# EAGLE board top_PCB_mini (EAGLE 8.1.1)
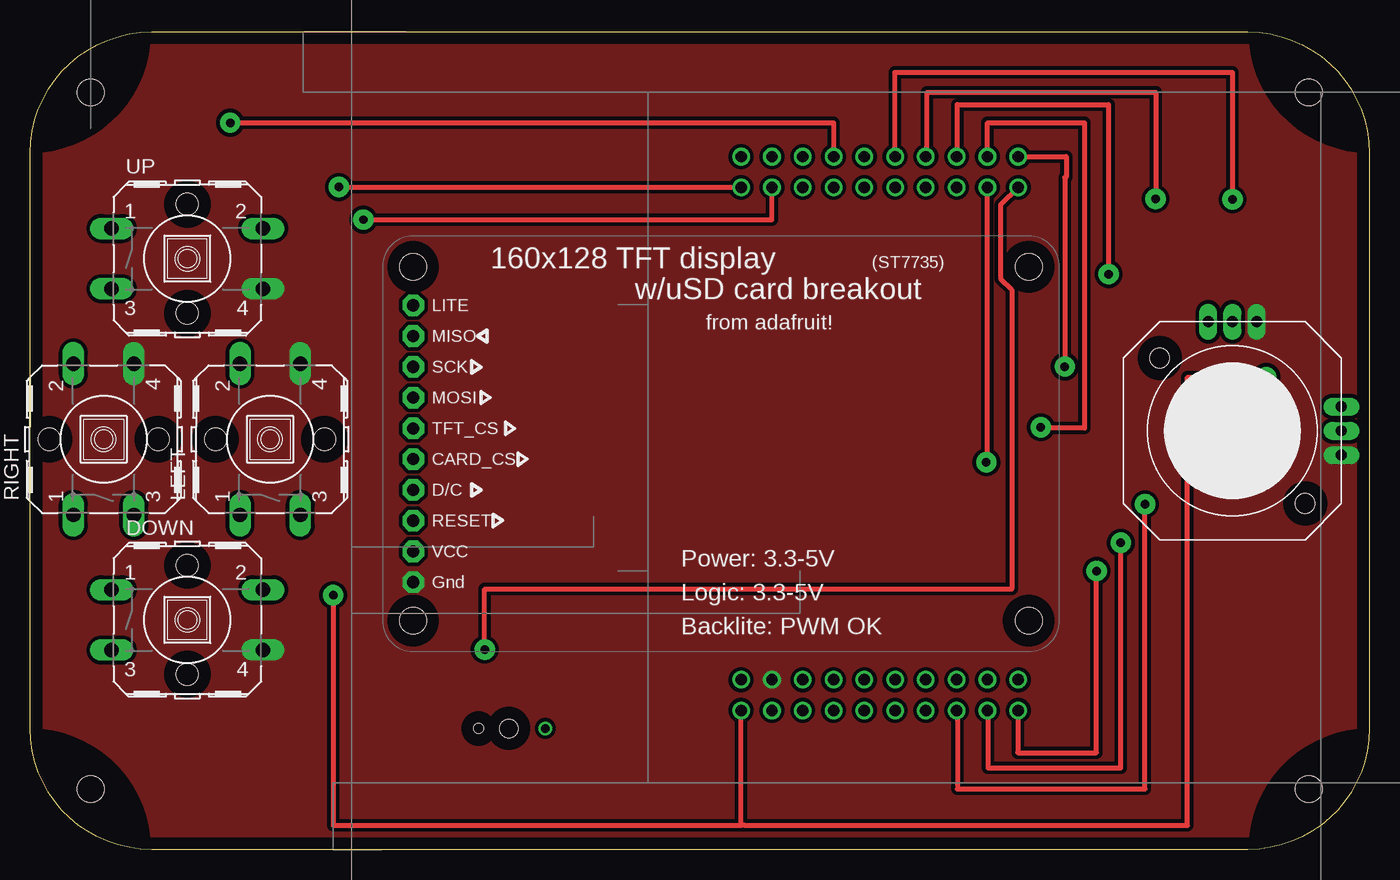
[diagram p0: board, top side]
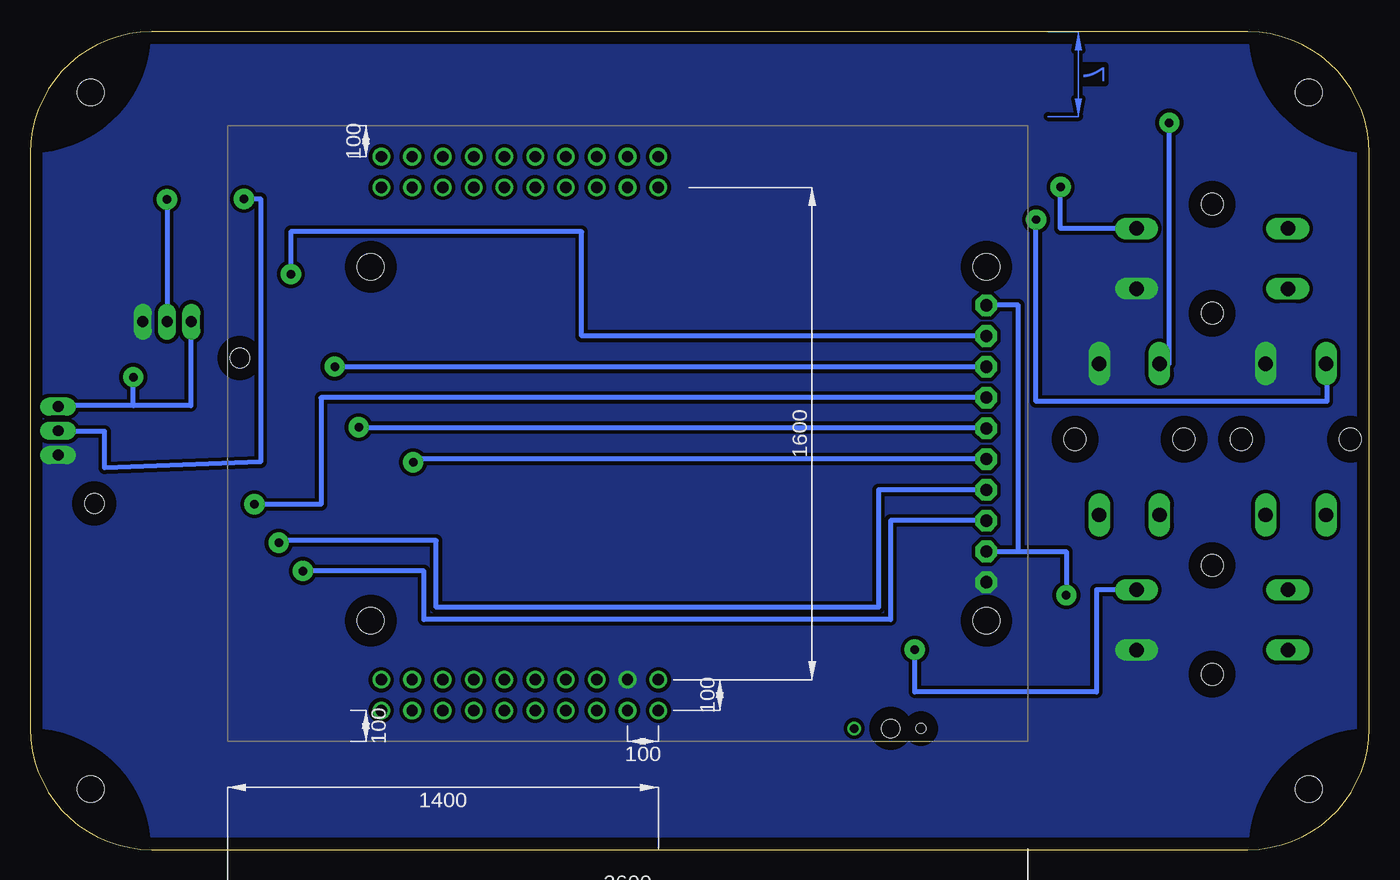
[diagram p1: board, bottom side, seen from below]

Size 110.5 x 67.5 mm. Coordinates in mm from the lower left corner, seen from the top.
Outline: 0,57.5 arc-90 10,67.5 100.5,67.5 arc-90 110.5,57.5 110.5,10 arc-90 100.5,0 10,0 arc-90 0,10 0,57.5
Copper layers (1*16): Top 0.035mm / dielectric 1.5mm / Bottom 0.035mm
Design rules "default": minimum track width 10mil, minimum drill 24mil, track to track 8mil, track to pad 8mil, pad to pad 8mil, via to via 8mil, smd to smd 8mil, copper to edge 40mil, drill to drill 8mil, minimum pad ring 10mil, minimum via ring 8mil, stop-mask expansion 4mil, vias tented up to drill 0mil, thermal gap 10mil
Holes 2.2 mm at 5,5 5,62.5 105.5,62.5 105.5,5
Holes 1.5 mm at 39.5,10
Holes 0.8 mm at 37,10

## Footprints (pad centres in the part's own frame; a part is rotated, then mirrored left to right if it is on the bottom)
ADAFRUITST7735R_18 = drill 1 pad 1.778 octagon: CARD_CS -25.4,-1.27; D/C -25.4,-3.81; GND -25.4,-11.43; LITE -25.4,11.43; MISO -25.4,8.89; MOSI -25.4,3.81; RESET -25.4,-6.35; SCK -25.4,6.35; TFT_CS -25.4,1.27; VCC -25.4,-8.89 | hole 2.2: -25.4,14.605; -25.4,-14.605; 25.4,-14.605; 25.4,14.605
B3F-40XX-MOD = drill 1.194 long: A1 6.218,2.559; A2 -6.278,2.559; B1 6.218,-2.419; B2 -6.278,-2.419 | hole 1.803: -0.03,-4.426; -0.03,4.566
1_05X2MM = drill 0.94: +3.3V -7.62,8.89; GND_L -10.16,6.35; GND_R -53.34,8.89; PA2 -53.34,-13.97; PA3 -53.34,-11.43; PA4 -53.34,-8.89; PA5 -7.62,-8.89; PA6 -7.62,-11.43; PA7 -7.62,-13.97; PB0 -7.62,3.81; PB1 -7.62,1.27; PB2 -53.34,6.35; PB3 -50.8,3.81; PB4 -7.62,-6.35; PB5 -7.62,6.35; PB6 -53.34,-6.35; PB7 -53.34,-3.81; PC4 -50.8,1.27; PC5 -50.8,-1.27; PC6 -50.8,-3.81; PC7 -50.8,-6.35; PD0 -10.16,3.81; PD1 -10.16,1.27; PD2 -10.16,-1.27; PD3 -10.16,-3.81; PD6 -50.8,-8.89; PD7 -50.8,-11.43; PE0 -53.34,3.81; PE1 -10.16,-6.35; PE2 -10.16,-8.89; PE3 -10.16,-11.43; PE4 -7.62,-1.27; PE5 -7.62,-3.81; PF0 -53.34,1.27; PF1 -10.16,-13.97; PF2 -50.8,8.89; PF3 -50.8,6.35; PF4 -50.8,-13.97; RST -53.34,-1.27; VBUS -10.16,8.89
JOYSTICK = drill 0.9 pad 1.5 long: GNDX 8.62,-2.33; GNDY 1.62,8.67; VCCX 8.62,1.67; VCCY -2.38,8.67; X 8.62,-0.33; Y -0.38,8.67 | hole 1.6: -6.38,5.67; 5.62,-6.33

## Placement (x,y rotation side)
DISPLAY  ADAFRUITST7735R_18  [ADAFRUITST7735R_18]  57,33.5 0 top
DOWN  TACTILEBUTTONTHROUGHHOLE  [B3F-40XX-MOD]  12.99,18.89 0 top
LAUNCHPAD  TM4CTM4C  [1_05X2MM]  67.56,3.86 270 bottom
LEFT  TACTILEBUTTONTHROUGHHOLE  [B3F-40XX-MOD]  19.86,33.9 90 top
LEFTJOYSTICK  JOYSTICKADAFRUIT  [JOYSTICK]  99.59,34.9 0 top
RIGHT  TACTILEBUTTONTHROUGHHOLE  [B3F-40XX-MOD]  6.12,33.9 90 top
UP  TACTILEBUTTONTHROUGHHOLE  [B3F-40XX-MOD]  12.99,48.71 0 top

## Library data of the parts
DISPLAY = AdafruitST7735R_18
DOWN LEFT RIGHT UP = AdafruitButton
LAUNCHPAD = TM4C
LEFTJOYSTICK = AdafruitJoystick

## Nets
GND: DISPLAY.GND DOWN.B1 LAUNCHPAD.GND_L LEFT.B1 LEFTJOYSTICK.GNDX LEFTJOYSTICK.GNDY RIGHT.B1 UP.B1
GND_R: LAUNCHPAD.GND_R
N$1: DISPLAY.RESET LAUNCHPAD.PA7
N$2: DISPLAY.D/C LAUNCHPAD.PA6
N$3: DISPLAY.CARD_CS LAUNCHPAD.PD7
N$5: DISPLAY.TFT_CS LAUNCHPAD.PA3
N$6: DISPLAY.MOSI LAUNCHPAD.PA5
N$7: DISPLAY.SCK LAUNCHPAD.PA2
N$8: DISPLAY.MISO LAUNCHPAD.PA4
N$9: LAUNCHPAD.PF2 UP.A1
N$28: LAUNCHPAD.PB6 LEFTJOYSTICK.X
N$29: LAUNCHPAD.PF0 LEFT.A1
N$30: LAUNCHPAD.PF3 RIGHT.A1
N$31: DISPLAY.LITE DISPLAY.VCC LAUNCHPAD.+3.3V LEFTJOYSTICK.VCCX LEFTJOYSTICK.VCCY
N$32: DOWN.A1 LAUNCHPAD.PF4
N$34: LAUNCHPAD.PB7 LEFTJOYSTICK.Y
VBUS: LAUNCHPAD.VBUS

## Tracks (layer width: path | path; a pad name or v marks a point on that pad's centre or on a via)
GND
  pour Bottom (isolate 0.305, no thermals): 10,67.5 arc-90 0,57.5 0,10 arc-90 10,0 100.5,0 arc-90 110.5,10 110.5,57.5 arc-90 100.5,67.5
  pour Top (isolate 0.305, no thermals): 10,67.5 arc-90 0,57.5 0,10 arc-90 10,0 100.5,0 arc-90 110.5,10 110.5,57.5 arc-90 100.5,67.5
N$1  (via drill 0.7 pad 1.68)
  Top 0.406: LAUNCHPAD.PA7 81.5,11.48 81.5,8 88,8 v88,23
  Bottom 0.406: DISPLAY.RESET 39.5,27.15 39.5,19 78,19 78,23 v88,23
N$2  (via drill 0.7 pad 1.68)
  Top 0.406: LAUNCHPAD.PA6 79.05,11.48 79.05,6.74 90,6.74 v90,25.32 90,25.5
  Bottom 0.406: DISPLAY.D/C 40.5,29.69 40.5,20 77,20 77,25.5 90,25.5 v90,25.32
N$3  (via drill 0.7 pad 1.68)
  Top 0.406: v78.9,31.98 78.99,31.98 LAUNCHPAD.PD7
  Bottom 0.406: DISPLAY.CARD_CS 78.9,32.23 v78.9,31.98
N$4  (via drill 0.7)
  other vias: 42.5,10
N$5  (via drill 0.7 pad 1.68)
  Top 0.406: LAUNCHPAD.PA3 79,60 87.01,60 87.01,34.79 83.4,34.79 v83.4,34.85
  Bottom 0.406: v83.4,34.85 31.6,34.85 DISPLAY.TFT_CS
N$6  (via drill 0.7 pad 1.68)
  Top 0.406: LAUNCHPAD.PA5 76.5,11.48 76.5,5 92,5 v92,28.5
  Bottom 0.406: DISPLAY.MOSI 86.5,37.31 86.5,28.5 v92,28.5
N$7  (via drill 0.7 pad 1.68)
  Top 0.406: LAUNCHPAD.PA2 85.5,57.2 85.5,55.5 85.38,55.5 v85.38,39.87
  Bottom 0.406: DISPLAY.SCK 85.38,39.85 v85.38,39.87
N$8  (via drill 0.7 pad 1.68)
  Top 0.406: LAUNCHPAD.PA4 76.5,57.2 76.5,61.5 89,61.5 v89,47.5
  Bottom 0.406: DISPLAY.MISO 65,42.39 65,51 89,51 v89,47.5
N$9  (via drill 0.7 pad 1.68)
  Top 0.406: v25.47,54.69 58.67,54.69 LAUNCHPAD.PF2
  Bottom 0.406: UP.A1 25.47,51.27 v25.47,54.69
N$28  (via drill 0.7 pad 1.68)
  Top 0.406: LAUNCHPAD.PB6 74,57.2 74,62.5 92.87,62.5 v92.87,53.72
  Bottom 0.406: v92.87,53.72 91.5,53.72 91.5,32 104.36,31.5 104.36,34.53 108.21,34.53 LEFTJOYSTICK.X
N$29  (via drill 0.7 pad 1.68)
  Top 0.406: v16.5,60 66.29,60 LAUNCHPAD.PF0
  Bottom 0.406: LEFT.A1 16.5,40.12 v16.5,60
N$30  (via drill 0.7 pad 1.68)
  Top 0.406: v27.5,52 61.21,52 LAUNCHPAD.PF3
  Bottom 0.406: RIGHT.A1 3.5,40.12 3.5,37 27.5,37 v27.5,52
N$31  (via drill 0.7 pad 1.68)
  Top 0.406: 58.67,2 59,2 95.5,2 95.5,39 v102,39 | 58.67,2 LAUNCHPAD.+3.3V | v25,21 25,2 58.67,2
  Bottom 0.406: DISPLAY.LITE 28.96,44.93 28.96,24.61 | DISPLAY.VCC 28.96,24.61 | LEFTJOYSTICK.VCCY 97.25,43.57 97.25,36.64 102,36.64 | 102,36.64 108.21,36.64 LEFTJOYSTICK.VCCX | 28.96,24.61 25,24.61 v25,21 | 102,36.64 v102,39
N$32  (via drill 0.7 pad 1.68)
  Top 0.406: LAUNCHPAD.PF4 80.08,53.21 80.08,47.14 81,46.23 81,21.5 37.5,21.5 v37.5,16.5
  Bottom 0.406: DOWN.A1 22.5,21.45 22.5,13 37.5,13 v37.5,16.5
N$34  (via drill 0.7 pad 1.68)
  Top 0.406: LAUNCHPAD.PB7 71.35,57.2 71.35,64.15 99.22,64.15 v99.22,53.66
  Bottom 0.406: v99.22,53.66 v99.21,53.66 LEFTJOYSTICK.Y
(copper drawn outside any net)
  shapes: Bottom area x1